# Altium PCB ChargeControlBoard.PcbDoc
Units mm, origin at the board's own origin, x right, y up, seen from the top; angles counter-clockwise.
Board outline 99.73 x 79.97 mm, 2 copper layers (Top Layer, Bottom Layer); 23 components, 17 nets, 68 pads, 1 vias.
Unrouted connection lines stored in the file: 1.
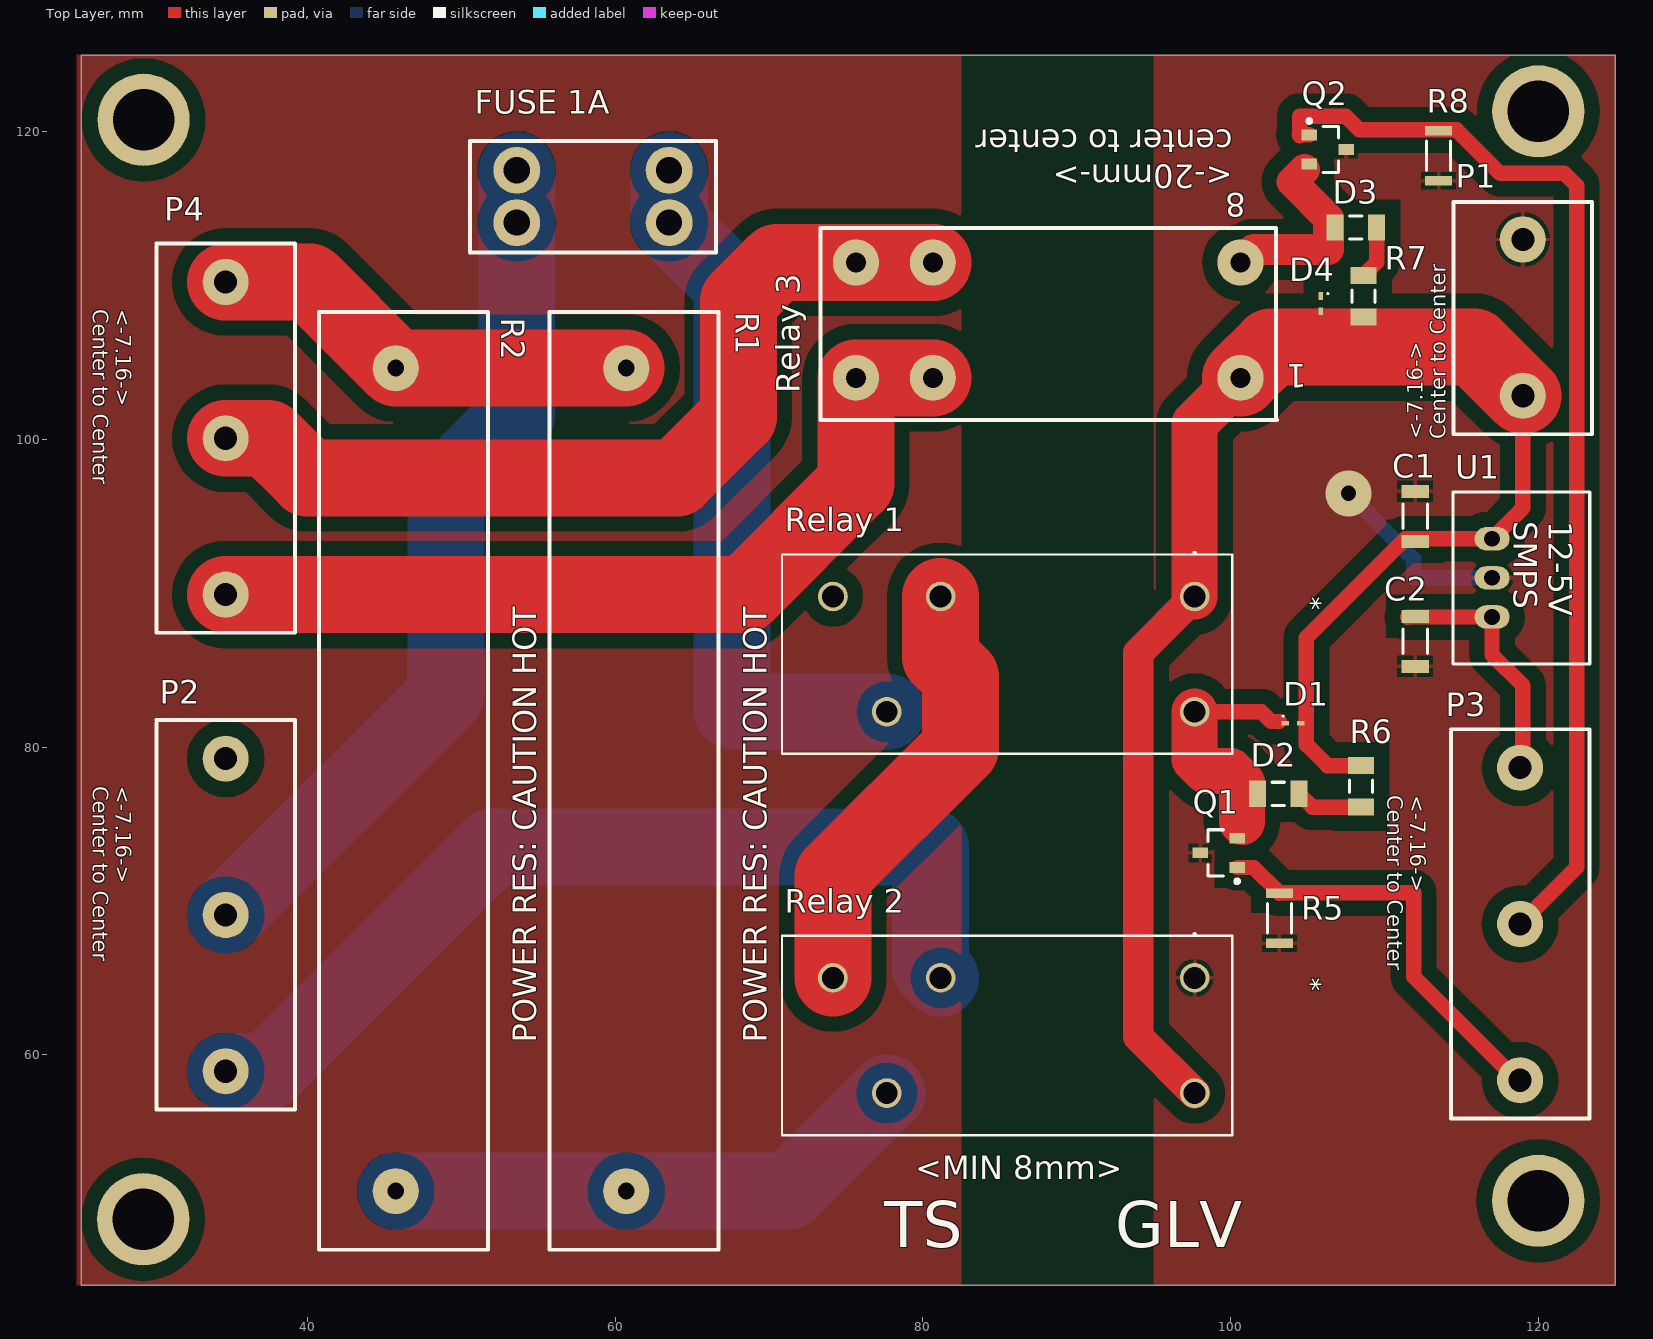
[diagram p0: Top Layer view]
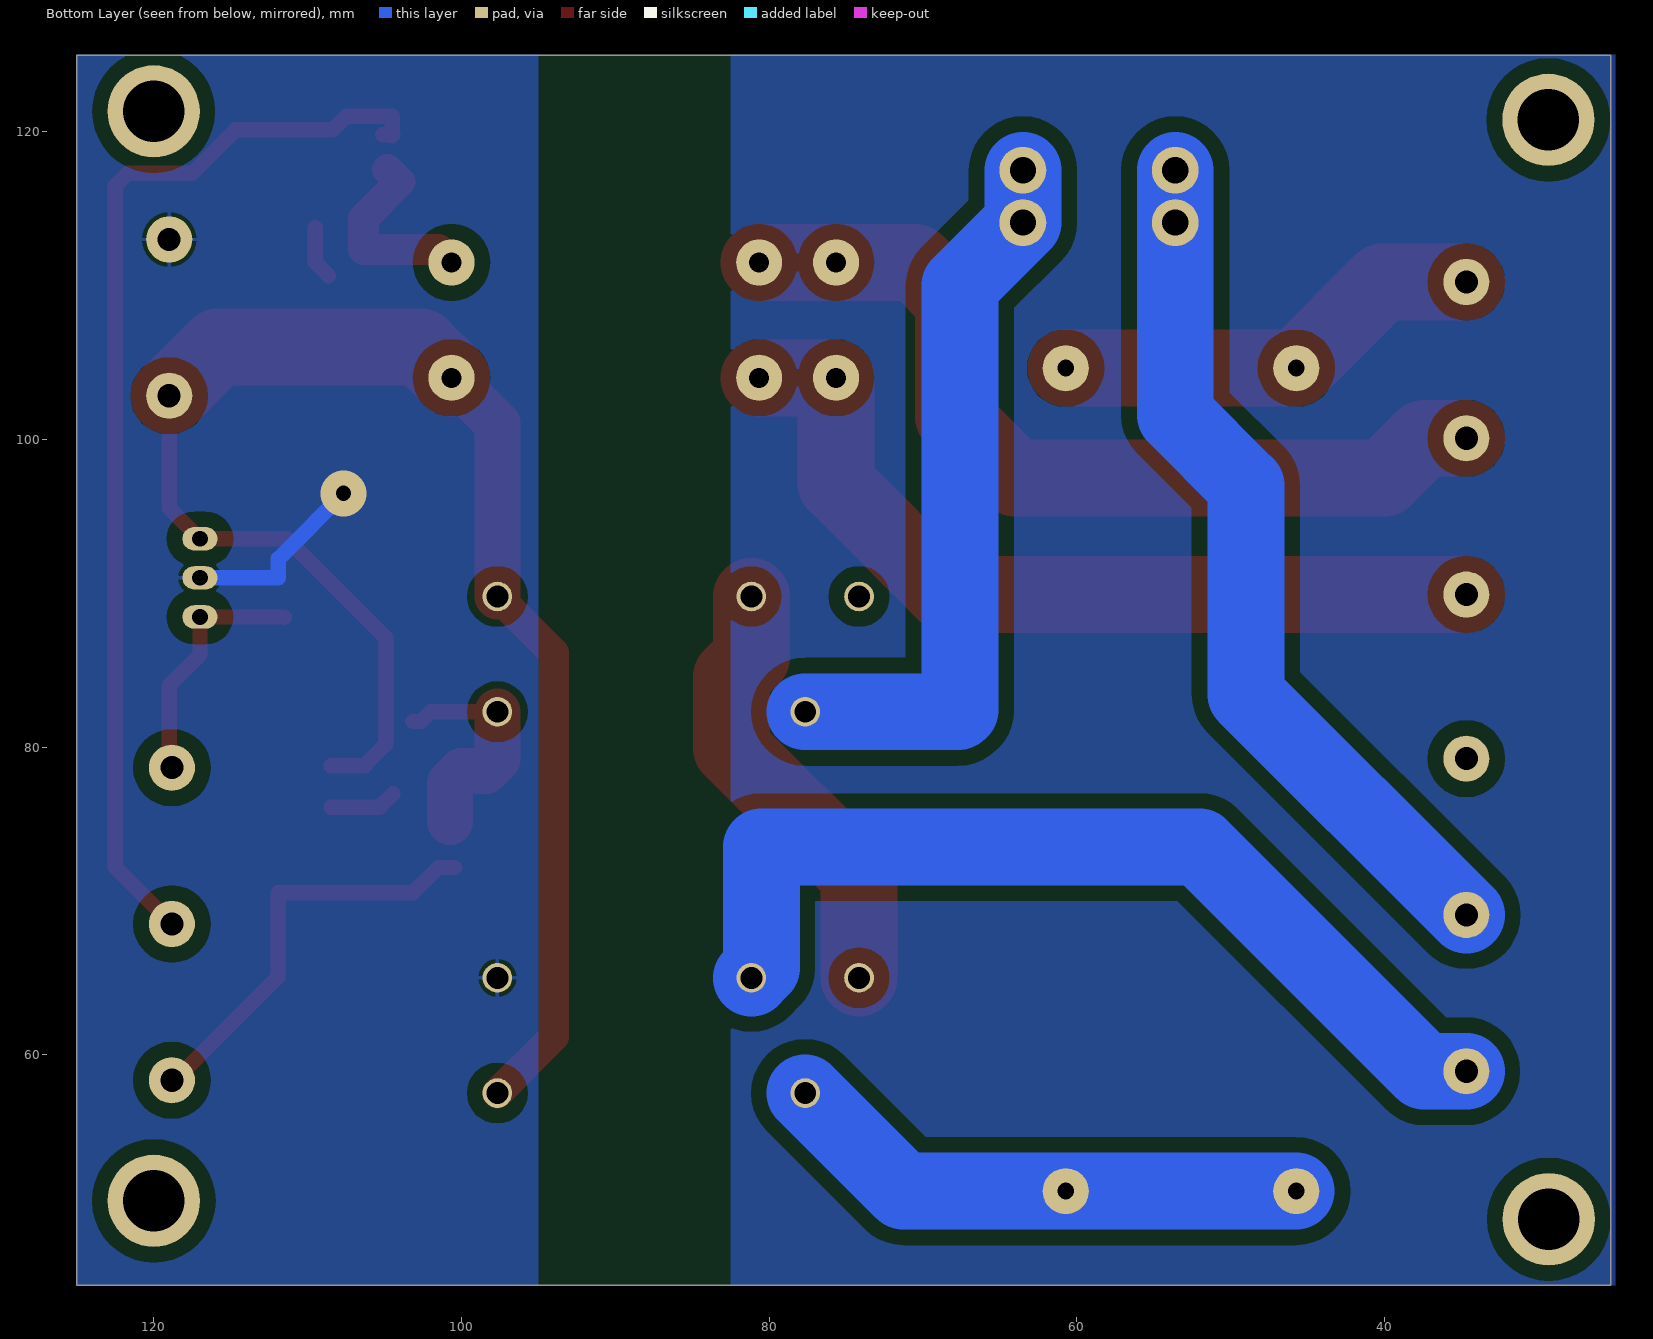
[diagram p1: Bottom Layer view, seen from below]

## Layer stack, top to bottom
Top Solder: solder mask 0.0102, Solder Resist, Dk 3.5
Top Layer: signal copper 0.0356
Dielectric 1: dielectric 0.32, FR-4, Dk 4.8
Bottom Layer: signal copper 0.0356
Bottom Solder: solder mask 0.0102, Solder Resist, Dk 3.5

## Board outline
25.273,124.968 25.273,45 125,45 125,124.968

## Design rules (kind name [scope] priority, off if disabled: settings)
Clearance [All] p1: gap=0.254 ignorepadtopadclearanceinfootprint=FALSE except(0: Arc-Hole Track-Hole SMDPad-Hole THPad-Hole Via-Hole Fill-Hole Poly-Hole Region-Hole Text-Hole; 1: Arc-Fill Arc-Poly Arc-Region Track-Fill Track-Poly Track-Region SMDPad-Fill SMDPad-Poly SMDPad-Region THPad-Fill THPad-Poly THPad-Region Via-Fill Via-Poly Via-Region Fill-Fill Fill-Poly Fill-Region Poly-Poly Poly-Region Region-Region)
PolygonConnect [All] p1: connectstyle=Relief reliefconductorwidth=0.254 reliefentries=4 polygonreliefangle="90 Angle" airgapwidth=0.254
RoomDefinition ChargeControlBoard [InComponentClass('ChargeControlBoard')] p1 off: confinementstyle=ConfineIn formatcopy=TRUE lockcomponents=FALSE outline 178.943,27.051 349.631,27.051 349.631,91.059 178.943,91.059
RoutingVias [All] p1: holewidth=0.711 width=1.27 viastyle="Through Hole" minholewidth=0.711 minwidth=1.27 maxholewidth=0.711 maxwidth=1.27
SolderMaskExpansion [All] p1: expansion=0.102
Width [All] p1: maxlimit=5 minlimit=0.25 preferedwidth=1
30 further rules are at their usual default settings.

## Components (designator, comment, footprint, x,y, rotation, side; value= is the part's Value field where it differs from the comment)
C1 "Cap2" 1206 112,95 r90 top value=10uF
C2 "Cap2" 1206 112,86.875 r270 top value=10uF
D1 "Diode" "DIODE SODFL100X48-2N" 104.064,81.559 r0 top
D2 "LED0" C1206 103.099,76.962 r180 top
D3 "LED0" C1206 108.15,113.775 r180 top
D4 "Diode" "DIODE SODFL100X48-2N" 105.875,108.825 r270 top
Dash? "Fuse 1" "Fuse Holder Mini ATC/ATO" 63.5,117.5 r180 top
P1 "Header 2" "2 Pos wire to board" 119,102.84 r0 top
P2 "Header 3" "3 Pos wire to board" 34.671,79.248 r180 top
P3 "Header 3" "3 Pos wire to board" 118.825,78.66 r180 top
P4 "Header 3" "3 Pos wire to board" 34.671,110.236 r180 top
Q1 "MOSFET-N" SOT23 99.225,73.125 r180 top
Q2 "MOSFET-N" SOT23 106.325,118.85 r0 top
R1 "Res1" "RES 1K 10W" 60.714,51.133 r0 top value=1K
R2 "Res1" "RES 1K 10W" 45.728,51.133 r0 top value=1K
R5 "1206" "1206 (High Density)" 103.175,68.875 r90 top value=1M
R6 "1206" C1206 108.483,77.445 r270 top value=500
R7 "1206" C1206 108.65,109.3 r90 top value=500
R8 "1206" "1206 (High Density)" 113.525,118.45 r90 top value=1M
"Relay 1" "RELAY SPDT FORM C Z3076-ND" "RELAY SPDT FORM C Z3076-ND" 77.724,82.296 r270 top
"Relay 2" "RELAY SPDT FORM C Z3076-ND" "RELAY SPDT FORM C Z3076-ND" 77.724,57.507 r270 top net-tie
"Relay 3" "Relay SPST Midpack" "Relay SPDT NO MIDPACK" 100.645,111.506 r180 top
U1 "12-5V SMPS" Rr-788E5 117,91 r270 top

## Footprints (in the part's own frame and the unit in brackets; to place one, negate y for a bottom-side part, rotate by r counter-clockwise, add the part's x,y. Pads: shape width x height; smd on the part's side, far side on the other; paste and mask are expansions set on the pad)
"2 Pos wire to board" [mm] "282843-2"
  round 3 hole 1.5: 1(0,0) 2(0,10.16)
  silkscreen extent -4.5,-2.5 4.5,12.6
"3 Pos wire to board" [mm] "A98085-ND"
  round 3 hole 1.5: 1(0,0) 2(0,10.16) 3(0,20.32)
  silkscreen extent -4.5,-2.5 4.5,22.8
1206 [mm] "Chip Capacitor, 2-Leads, Body 3.20x1.60mm, IPC Medium Density"
  rect 0.85x1.8 smd: 1(-1.625,0) 2(1.625,0)
  silkscreen extent -0.8,-0.8 0.8,0.8, body extent -1.7,-0.9 1.7,0.9, height 0.6
"1206 (High Density)" [mm] "Panasonic 1206 Resistor"
  rect 0.6x1.75 smd: 1(-1.625,0) 2(1.625,0)
  silkscreen extent -0.95,-0.78 0.95,0.77, body extent -1.5,-0.72 1.5,0.72, height 0.7
C1206 [mm] "Chip Capacitor, Body 3.2x1.6mm, IPC High Density"
  rect 1.1x1.7 smd: 1(-1.35,0) 2(1.35,0)
  silkscreen extent -0.4,-0.75 0.4,0.75, body extent -1.7,-0.9 1.7,0.9, height 1.3
"DIODE SODFL100X48-2N" [mm] "SODFL, 2-Leads, Body 0.60x1.00mm, IPC Medium Density 1SS413L3MCT-ND or 1SS413,L3M"
  rect 0.5x0.3 smd: 1(-0.5,0) 2(0.5,0)
  silkscreen extent -0.7,0.4 -0.6,0.5, body extent -0.42,-0.33 0.43,0.33, height 0.48
"Fuse Holder Mini ATC/ATO" [mil] "BK-6010"
  round 120 hole 67: 1(0,134) 1(0,0) 2(390,0) 2(390,134)
  silkscreen extent -120,-75 510,210, body extent -120,-75 510,210, height 290
"RELAY SPDT FORM C Z3076-ND" [mil] "Z3076-ND"
  round 76 / inner round 60 / far side round 76 hole 56 paste+0 mask+0: 1(-295,785) 2(-295,135) 4(-295,-140.59) 6(0,-2.8) 8(0,785)
  silkscreen extent -409,-271 108,881, body extent 0,-175 10,-165, height 10
"Relay SPDT NO MIDPACK" [mm] "Z5209-ND"
  round 3 hole 1.3: 1(0,7.5) 3(20,7.5) 4(25,7.5) 5(25,0) 6(20,0) 8(0,0)
  silkscreen extent -2.38,-2.25 27.3,10.25
"RES 1K 10W" [mm] "1.0KW-10-ND"
  round 3 hole 1.1: 1(0,0) 2(0,53.5)
  silkscreen extent -5,-3.81 6,57.15
Rr-788E5 [mil] "5V OUTPUT SMPS"
  oval 60x90 hole 40: 1(-100,0) 2(0,0) 3(100,0)
  silkscreen extent -220,-100 220,250, body extent -220,-100 220,250, height 409
SOT23 [mm] "SOT23, 3-Leads, Body 2.90x2.45mm, Pitch 0.95mm, IPC Medium Density"
  rect 1x0.7 smd: 1(-1.2,-0.95) 2(-1.2,0.95) 3(1.2,0)
  silkscreen extent -1.33,-1.5 0.7,1.97, body extent -0.7,-1.5 0.7,1.5, height 1.1

## Part data
C1 C2: "Capacitor", Supplier Part Number 1=1276-3298-1-ND, PackageDescription="Capacitor; 2 Leads", PackageReference=CAPR5-4X5, Published=23-Sep-2002, Publisher="Altium Limited", Supplier 1=Digi-Key
D1 D4: "Switching diode", Supplier Part Number 1=1SS413L3FCT-ND, Code_JEDEC=DO-214-AB, LatestRevisionDate=17-Jul-2002, LatestRevisionNote="Re-released for DXP Platform.", PackageDescription="DO-214-AB/SMC; 2 C-Bend Leads; Body 7.9 x 5.9 mm, inc. leads (LxW)", PackageReference=SMC, PackageVersion=Sep-1996, Published=8-Jun-2000, Publisher="Altium Limited", Supplier 1=Digi-Key
D2 D3: "Typical INFRARED GaAs LED", Supplier Part Number 1=1516-1172-1-ND, LatestRevisionDate=08-Jul-2005, LatestRevisionNote="Mech Layer 1 removed.", PackageDescription="LED; 2 Leads", PackageReference=LED-0, Published=8-Jun-2000, Publisher="Altium Limited", Supplier 1=Digi-Key
Dash?: library part "Fuse 2", "Fuse", LatestRevisionDate=17-Jul-2002, LatestRevisionNote="Re-released for DXP Platform.", PackageDescription="Thru-Hole; 2 Leads", PackageReference=PIN-W2/E2.8, Published=8-Jun-2000, Publisher="Altium Limited", Supplier 1=Digi-Key, Supplier 2=Digi-Key, Supplier Part Number 2=36-3568-ND
P1: "Header, 2-Pin", Supplier Part Number=A98084-ND, LatestRevisionDate=17-Jul-2002, LatestRevisionNote="Re-released for DXP Platform.", Publisher="Altium Limited"
P2 P3 P4: "Header, 3-Pin", Supplier Part Number=A98085-ND, LatestRevisionDate=17-Jul-2002, LatestRevisionNote="Re-released for DXP Platform.", Publisher="Altium Limited"
Q1 Q2: "N-Channel MOSFET", Supplier Part Number 1=SSM3K329RLFCT-ND, LatestRevisionDate=17-Jul-2002, LatestRevisionNote="Re-released for DXP Platform.", PackageDescription="TO, Flat Index; 3 In-Line, Axial Leads; Body Dia. 4.6mm; Lead Dia. 0.5 mm (max)", PackageReference=E3, PackageVersion=1995/1996, Published=8-Jun-2000, Publisher="Altium Limited", Supplier 1=Digi-Key
R1 R2: "Resistor", Supplier Part Number=1.0KW-10-ND, LatestRevisionDate=17-Jul-2002, LatestRevisionNote="Re-released for DXP Platform.", PackageDescription="Axial Device, Thru-Hole; 2 Leads; 0.3 in Pin Spacing", PackageReference=AXIAL-0.3, Published=8-Jun-2000, Publisher="Altium Limited"
R5 R8: library part Res1, "Resistor", Supplier Part Number 1=RG3216P-1004-B-T1, LatestRevisionDate=17-Jul-2002, LatestRevisionNote="Re-released for DXP Platform.", PackageDescription="Axial Device, Thru-Hole; 2 Leads; 0.3 in Pin Spacing", PackageReference=AXIAL-0.3, Published=8-Jun-2000, Publisher="Altium Limited", Supplier 1=Digi-Key
R6 R7: library part Res1, "Resistor", Supplier Part Number 1=RNCP1206FTD511RCT-ND, LatestRevisionDate=17-Jul-2002, LatestRevisionNote="Re-released for DXP Platform.", PackageDescription="Axial Device, Thru-Hole; 2 Leads; 0.3 in Pin Spacing", PackageReference=AXIAL-0.3, Published=8-Jun-2000, Publisher="Altium Limited", Supplier 1=Digi-Key
"Relay 1" "Relay 2": Supplier Part Number 1=Z3076-ND
"Relay 3": Supplier Part Number 1=Z5209-ND
U1: library part Component_1, Supplier Part Number 1=945-2201-ND, Supplier 1=Digi-Key

## Free pads (board coordinates)
  round 6 hole 4: 14(29.312,49.302) 14(29.337,120.777) 14(120,50.5) 14(120.012,121.327)

## Via types
v1: diameter 3, hole 1, Top Layer to Bottom Layer, 1 vias

## Nets (pads, with @x,y where several pads share a name; then routed paths per layer and width w, separated by ;. In a path a pad name is that pad's centre, name@x,y a point inside that pad or via, vN(x,y) a via of type N, cw(c..) or ccw(c..) an arc to the next point about the centre after c; other vN are vias at no path point)
AIR-: "Relay 2.2" P2.3 | length 60.6
  Bottom Layer w5: P2.3 37.428,58.928 52,73.5 80.5,73.5 80.5,65.653 81.153,65
CHARGER: "Relay 3.5" "Relay 3.6" P4.2 | length 57.2
  Top Layer w5: P4.2 37.424,100.076 40,97.5 64,97.5 68,101.5 68,109 70.506,111.506 75.645,111.506 80.645,111.506
GND: "Relay 2.1" C1.2 C2.2 P1.2 Q1.3 Q2.3 R5.1 R8.1 U1.2 | length 12.7
  Bottom Layer w1: v1@107.366,96.774 111.904,92.236 111.904,91 U1.2
  other v1: 107.671,96.495
MIDPACK: "Relay 3.3" "Relay 3.4" P4.3 | length 55.8
  Top Layer w5: P4.3 68.416,89.916 75.645,97.145 75.645,104.006 80.645,104.006
MIDPACK_ALLOWED: C2.1 P3.1 U1.3 | length 16.1
  Top Layer w1: C2.1@111.5,88.438 111.523,88.46 U1.3 117,86 119,84 P3.1@119,78.66
MIDPACK_IN: P3.2 Q2.2 R8.2 | length 71.4
  Top Layer w1: Q2.2 104.5,119.8 ; P3.2 122.5,72.175 122.5,116.5 121.7,117.3 117.525,117.3 114.7,120.125 108.375,120.125 107.5,121 104.5,121 104.5,119.8 ; 104.5,119.8 104.5,119.75 104.45,119.8 104.5,119.8
NetD1_1: "Relay 1.8" D1.1 D2.2 Q1.1 | length 15.1
  Top Layer w1: 97.663,82.296 102.002,82.296 102.637,81.661 103.175,81.661
  Top Layer w3: 97.663,82.296 97.663,79.212 98.435,78.44 99.978,78.44 100.75,77.669 100.75,75.15
NetD2_1: D2.1 R6.2 | length 4.4
  Top Layer w1: D2.1 105.316,76.095 R6.2
NetD3_1: D3.1 R7.2 | length 3.5
  Top Layer w1: R7.2 109.5,111.5 D3.1
NetD3_2: "Relay 3.8" D3.2 D4.1 Q2.1 | length 12.6
  Top Layer w2: 100.645,111.506 101.484,112.345 106.375,112.345 106.375,114.375 104,116.75 Q2.1@104.8,117.55
NetDash?_1: "Relay 1.6" Dash?.1 | length 46.9
  Bottom Layer w5: Dash?.1@63.5,117.5 63.5,114.096 67.596,110 67.596,82.404 67.704,82.296 77.653,82.296
NetR1_1: "Relay 2.6" R1.1 R2.1 | length 34.6
  Bottom Layer w5: R2.1 R1.1 71.279,51.133 77.653,57.507
"NetRelay 1_2": "Relay 1.2" "Relay 2.4" | length 28.8
  Top Layer w5: 74.153,65 74.153,71.653 82.448,79.948 82.448,84.552 81.153,85.847 81.153,89.789
PACK+: Dash?.2 P2.2 | length 56.3
  Bottom Layer w5: P2.2 49,83.417 49,97 53.594,101.594 53.594,114.096 Dash?.2@53.594,117.5
PRECHARGED: P3.3 Q1.2 R5.2 | length 27.3
  Top Layer w1: Q1.2 101.5,72.175 R5.2 ; R5.2@103.175,70.525 111.9,70.525 111.9,65.075 P3.3@118.73,58.245
TS+: P4.1 R1.2 R2.2 | length 28.4
  Top Layer w5: P4.1 40.125,110.236 R2.2 R1.2
"TSMS 12V": "Relay 1.1" "Relay 2.8" "Relay 3.1" C1.1 D1.2 D4.2 P1.1 R6.1 R7.1 U1.1 | length 107.2
  Top Layer w1: R6.1 106.295,78.795 104.927,80.162 104.927,87.122 111.345,93.54 U1.1 119,95.54 P1.1
  Top Layer w2: 97.663,57.507 94,61.17 94,86.126 97.663,89.789
  Top Layer w3: 97.663,89.789 97.663,101.024 100.645,104.006
  Top Layer w5: 100.645,104.006 102.639,106 115.84,106 P1.1
pads on no net: "Relay 1.4" P2.1

## Polygon pours and split planes (outlines as drawn)
GND on Top Layer "GND" (solid, pour order 4): 95,125 95,45 125,45 125,125
GND on Top Layer "GND" (solid, pour order 0): 82.5,125 82.5,45 25,45 25,125
GND on Bottom Layer "GND" (solid, pour order 6): 95,125 95,45 125,45 125,125
GND on Bottom Layer "GND" (solid, pour order 2): 25,125 82.5,125 82.5,45 25,45

## Silkscreen, mask and mechanical layers (free items; w line width, h text height)
Top Overlay:
  text "FUSE 1A" at 50.876,121.183 h1.52
  text "<MIN 8mm>" at 79.502,51.918 h1.52
  text "TS" at 77.5,47.5 h3
  text "GLV" at 92.5,47.5 h3
Mechanical 13:
  lines w0.254: 105.004,124.993 124.993,124.993 ; 124.993,124.993 124.993,45.009 25.019,45.009 25.019,124.993 124.993,124.993
Drill Drawing:
  lines w0.254: 143.256,0 144.932,0

## Text inside footprints (layer, text, board x,y; h text height)
P1: Top Overlay "<-7.16-> / Center to Center" at 114,100 h1 r90
P2: Top Overlay "<-7.16-> / Center to Center" at 26.035,77.47 h1 r270
P3: Top Overlay "<-7.16-> / Center to Center" at 110.189,76.882 h1 r270
P4: Top Overlay "<-7.16-> / Center to Center" at 26.035,108.458 h1 r270
R1: Top Overlay "POWER RES: CAUTION HOT" at 69.858,60.785 h1.52 r90
R2: Top Overlay "POWER RES: CAUTION HOT" at 54.872,60.785 h1.52 r90
"Relay 1": Top Overlay "*" at 104.619,89.789 h1.27 r270; Mechanical 13 "*" at 99.996,89.789 h1.27 r270
"Relay 2": Top Overlay "*" at 104.619,65 h1.27 r270; Mechanical 13 "*" at 99.996,65 h1.27 r270
"Relay 3": Top Overlay "<-20mm-> / center to center" at 100.137,120.142 h1.52 r180; Top Overlay "8" at 101,116 h1.52 r180; Top Overlay "1" at 104.963,104.902 h1.52 r180
U1: Top Overlay "12-5V / SMPS" at 118.397,94.683 h1.52 r270